# Altium PCB PCB_SteamShower.PcbDoc
Units mil, origin at the board's own origin, x right, y up, seen from the top; angles counter-clockwise.
Board outline 6000 x 4000 mil, 2 copper layers (Top Layer, Bottom Layer); 47 components, 61 nets, 182 pads, 0 vias.
Unrouted connection lines stored in the file: 103.
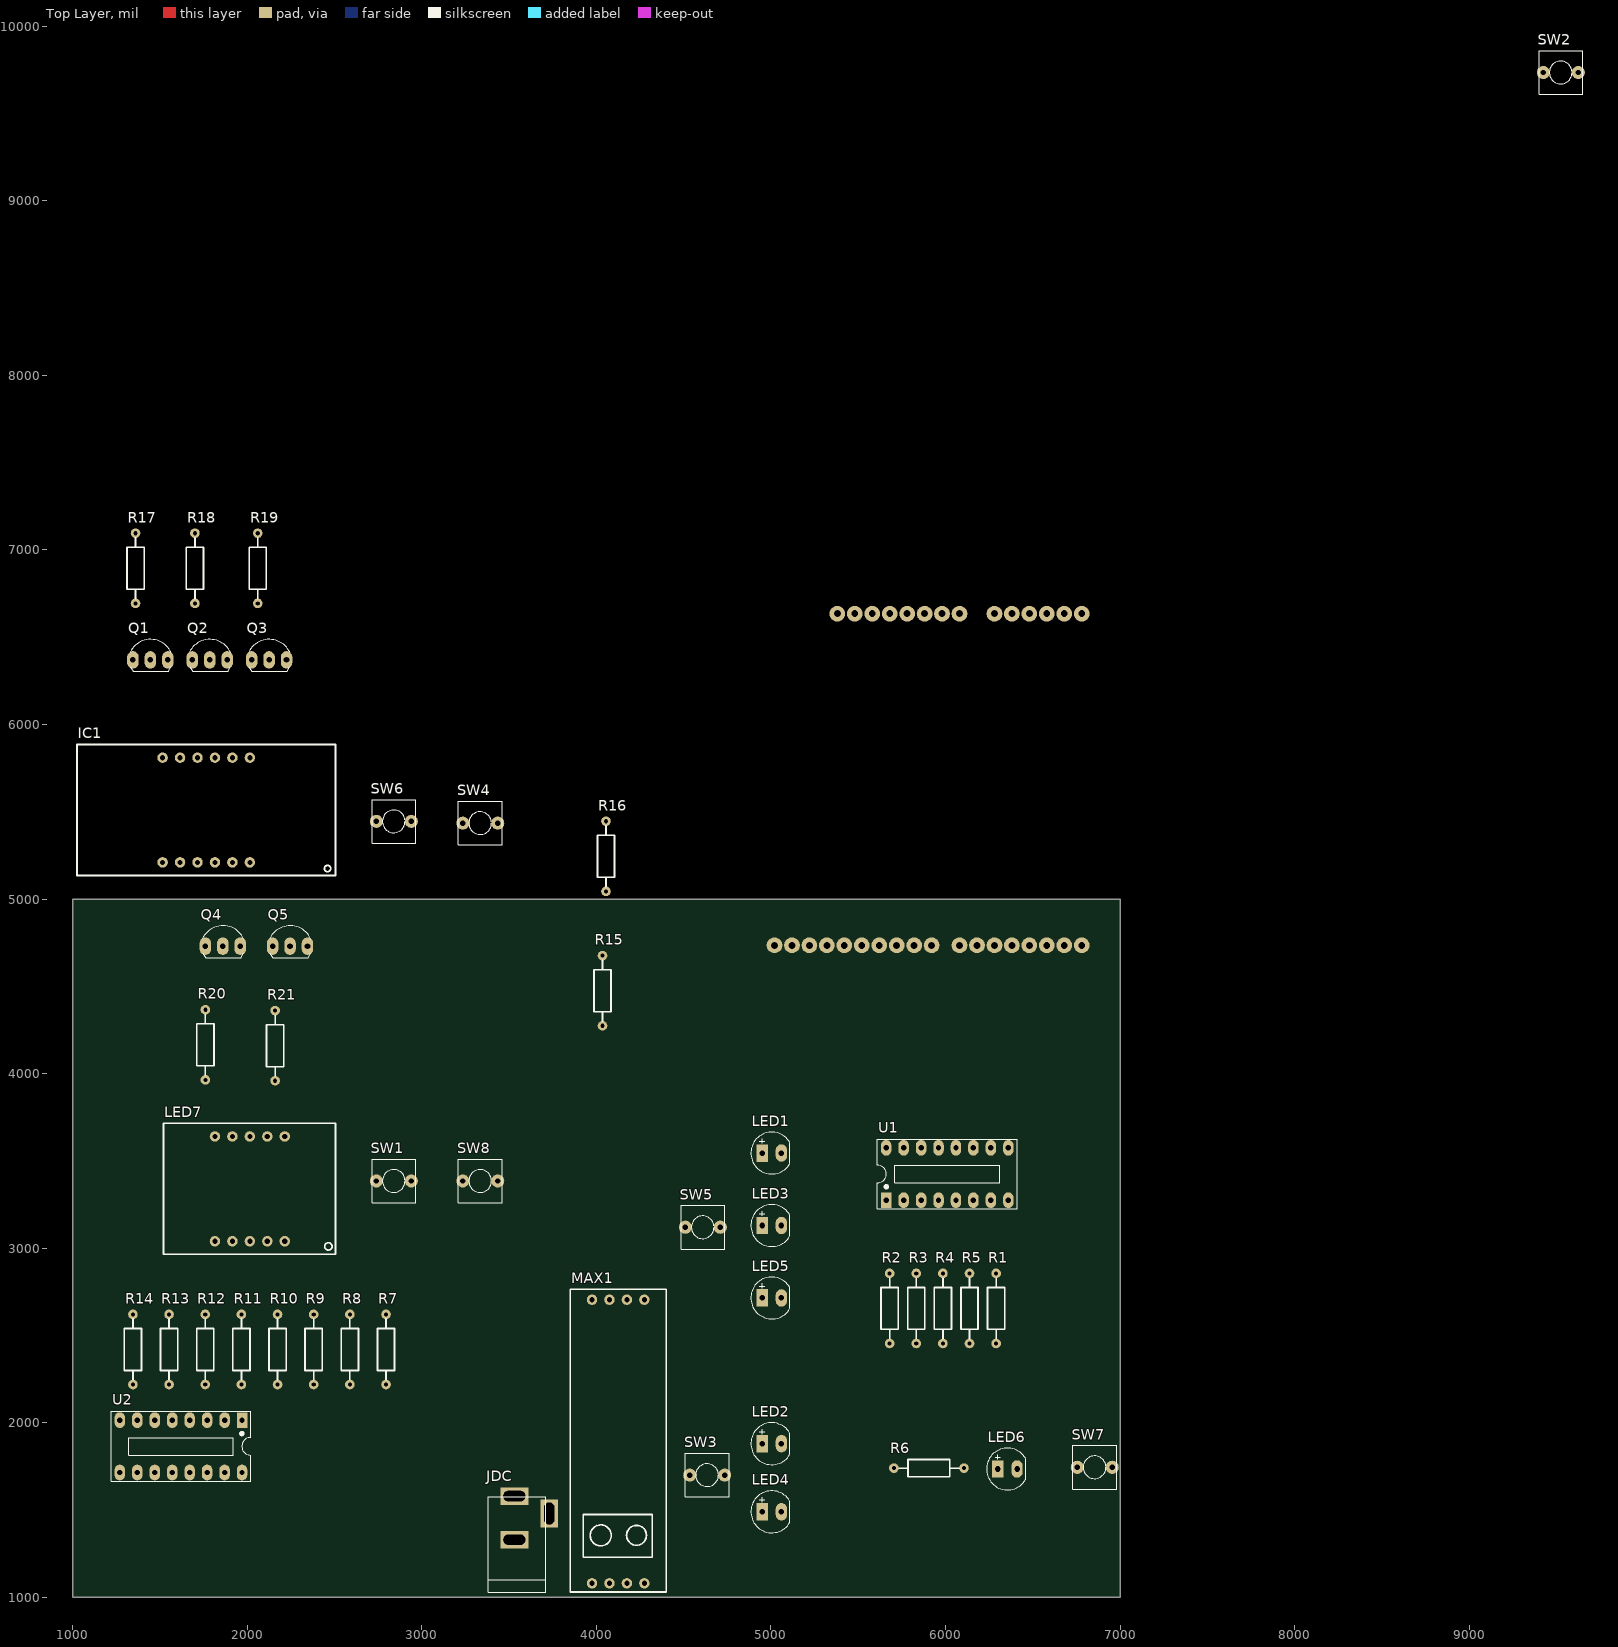
[diagram p0: Top Layer view]
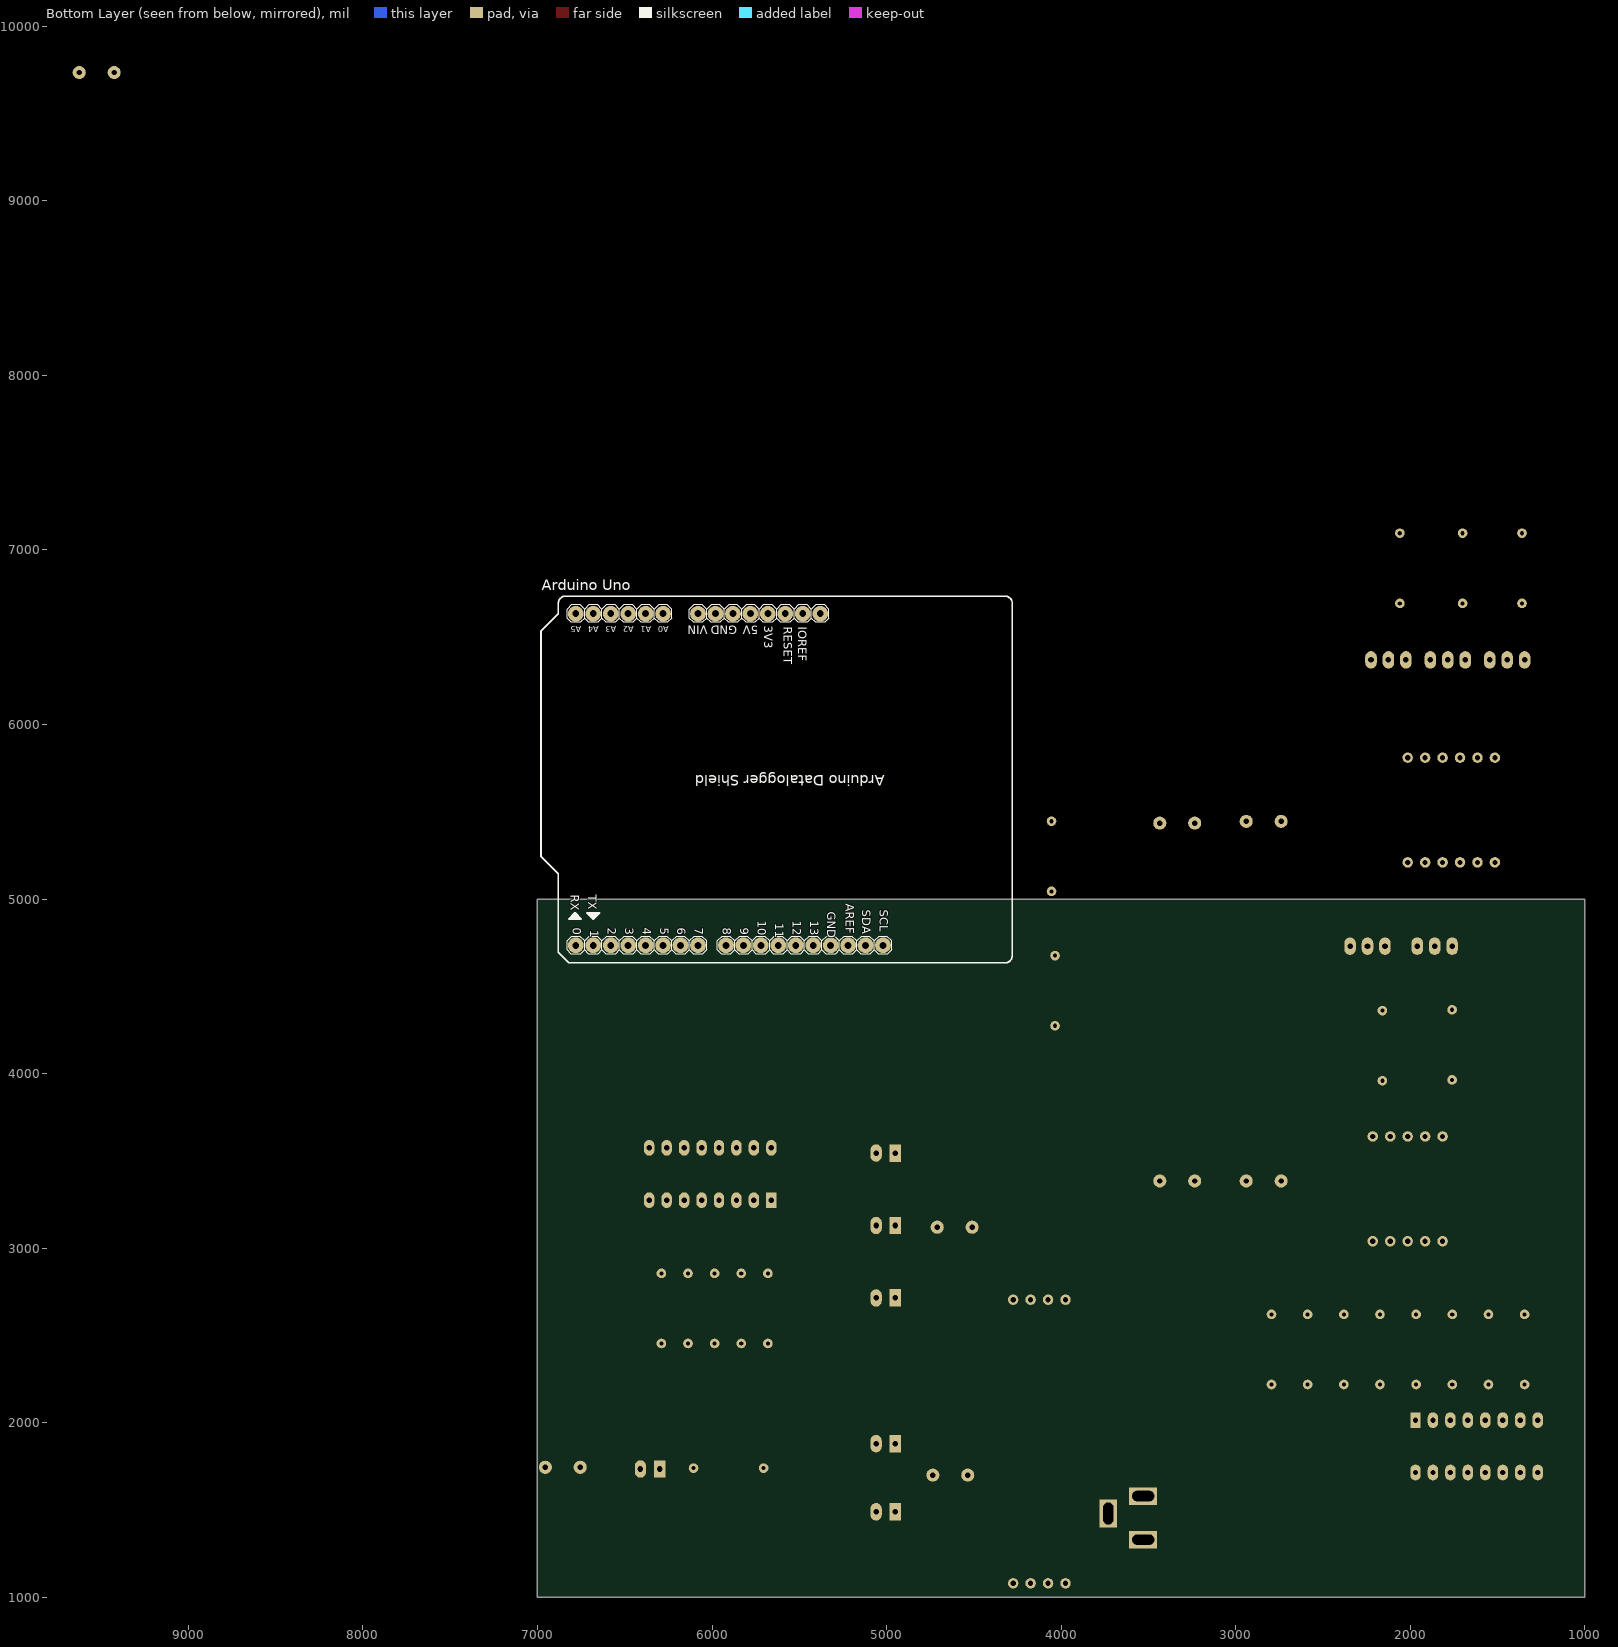
[diagram p1: Bottom Layer view, seen from below]

## Layer stack, top to bottom
Top Solder: solder mask 0.4, Solder Resist, Dk 3.5
Top Layer: signal copper 1.4
Dielectric 1: dielectric 12.6, FR-4, Dk 4.8
Bottom Layer: signal copper 1.4
Bottom Solder: solder mask 0.4, Solder Resist, Dk 3.5

## Board outline
1000,1000 7000,1000 7000,5000 1000,5000

## Design rules (kind name [scope] priority, off if disabled: settings)
Clearance [All] p1: gap=10
PolygonConnect [All] p1: connectstyle=Relief reliefconductorwidth=10 reliefentries=4 polygonreliefangle="90 Angle" airgapwidth=10
RoutingVias [All] p1: holewidth=28 width=50 viastyle="Through Hole" minholewidth=28 minwidth=50 maxholewidth=28 maxwidth=50
SolderMaskExpansion [All] p1: expansion=4
Width [All] p1: maxlimit=10 minlimit=10 preferedwidth=10
30 further rules are at their usual default settings.

## Components (designator, comment, footprint, x,y, rotation, side; value= is the part's Value field where it differs from the comment)
"Arduino Uno" "ARDUINO UNO" "ARDUINO UNO" 5700,5690 r0 bottom
IC1 "Component_1" 7SEG_MPX3 1515,5210 r0 top
JDC "Jack DC5.5x2.1" DC-IN 3630,1455 r90 top
LED1 "LED 5mm Do" "LED 5mm DO" 5005,3545 r0 top
LED2 "LED 5mm Do" "LED 5mm DO" 5005,1880 r0 top
LED3 "LED 5mm Do" "LED 5mm DO" 5005,3130 r0 top
LED4 "LED 5mm Do" "LED 5mm DO" 5005,1490 r0 top
LED5 "LED 5mm Do" "LED 5mm DO" 5005,2715 r0 top
LED6 "LED 5mm Do" "LED 5mm DO" 6355,1735 r0 top
LED7 "Component_1" 5621AS_Lib 1815,3040 r0 top
MAX1 "Component_1" MAX485_Module 4275,2705 r180 top
Q1 "C1815" QTO-92 1445,6370 r0 top
Q2 "C1815" QTO-92 1785,6370 r0 top
Q3 "C1815" QTO-92 2125,6370 r0 top
Q4 "C1815" QTO-92 1860,4730 r0 top
Q5 "C1815" QTO-92 2245,4730 r0 top
R1 "220R" "tro vach 1/4w" 6290,2655 r270 top
R2 "220R" "tro vach 1/4w" 5680,2655 r270 top
R3 "220R" "tro vach 1/4w" 5832.5,2655 r270 top
R4 "220R" "tro vach 1/4w" 5985,2655 r270 top
R5 "220R" "tro vach 1/4w" 6137.5,2655 r270 top
R6 "220R" "tro vach 1/4w" 5905,1740 r0 top
R7 "220R" "tro vach 1/4w" 2795,2420 r90 top
R8 "220R" "tro vach 1/4w" 2587.86,2420 r90 top
R9 "220R" "tro vach 1/4w" 2380.71,2420 r90 top
R10 "220R" "tro vach 1/4w" 2173.57,2420 r90 top
R11 "220R" "tro vach 1/4w" 1966.43,2420 r90 top
R12 "220R" "tro vach 1/4w" 1759.29,2420 r90 top
R13 "220R" "tro vach 1/4w" 1552.14,2420 r90 top
R14 "220R" "tro vach 1/4w" 1345,2420 r90 top
R15 "10k" "tro vach 1/4w" 4035,4475 r90 top
R16 "10k" "tro vach 1/4w" 4055,5245 r270 top
R17 "1k" "tro vach 1/4w" 1360,6895 r270 top
R18 "1k" "tro vach 1/4w" 1700,6895 r270 top
R19 "1k" "tro vach 1/4w" 2060,6895 r270 top
R20 "1k" "tro vach 1/4w" 1760,4165 r90 top
R21 "1k" "tro vach 1/4w" 2160,4160 r90 top
SW1 "Nut Nhan 2 Chan ( Dip )" SW2 2740,3385 r0 top
SW2 "Nut Nhan 2 Chan ( Dip )" SW2 9425,9735 r0 top
SW3 "Nut Nhan 2 Chan ( Dip )" SW2 4535,1700 r0 top
SW4 "Nut Nhan 2 Chan ( Dip )" SW2 3235,5435 r0 top
SW5 "Nut Nhan 2 Chan ( Dip )" SW2 4510,3120 r0 top
SW6 "Nut Nhan 2 Chan ( Dip )" SW2 2740,5445 r0 top
SW7 "Nut Nhan 2 Chan ( Dip )" SW2 6755,1745 r0 top
SW8 "Nut Nhan 2 Chan ( Dip )" SW2 3235,3385 r0 top
U1 "74HC595" DIP16/W0.3 5660,3275 r0 top
U2 "74HC595" DIP16/W0.3 1970,2015 r180 top

## Footprints (in the part's own frame and the unit in brackets; to place one, negate y for a bottom-side part, rotate by r counter-clockwise, add the part's x,y. Pads: shape width x height; smd on the part's side, far side on the other; paste and mask are expansions set on the pad)
7SEG_MPX3 [mil] "5631AS Led 7 segment 3 digits"
  round 60 hole 30: 1(0,0) 2(100,0) 3(200,0) 4(300,0) 5(400,0) 6(500,0) 7(500,600) 8(400,600) 9(300,600) 10(200,600) 11(100,600) 12(0,600)
  silkscreen extent -490,-75 990,675
5621AS_Lib [mil] "LED 7-segment 2 digits"
  round 60 hole 30: 1(0,0) 2(100,0) 3(200,0) 4(300,0) 5(400,0) 6(400,600) 7(300,600) 8(200,600) 9(100,600) 10(0,600)
  silkscreen extent -295,-75 690,675
"ARDUINO UNO" [mm]
  round 2.3 hole 1: 0(27.44,24.26) 1(24.9,24.26) 2(22.36,24.26) 3(19.82,24.26) 3.3V(-0.5,-24) 4(17.28,24.26) 5(14.74,24.26) 5V(2.04,-24) 6(12.2,24.26) 7(9.66,24.26) 8(5.596,24.26) 9(3.056,24.26) 10(0.516,24.26) 11(-2.024,24.26) 12(-4.564,24.26) 13(-7.104,24.26) A0(14.74,-24) A1(17.28,-24) A2(19.82,-24) A3(22.36,-24) A4(24.9,-24) A5(27.44,-24) AREF(-12.184,24.26) GND1(7.12,-24) GND2(4.58,-24) GND3(-9.644,24.26) IOREF(-5.58,-24) NC(-8.12,-24) RST(-3.04,-24) SCL(-17.264,24.26) SDA(-14.724,24.26) Vin(9.66,-24)
  silkscreen extent -36.06,-26.54 32.52,26.8
DC-IN [mil] "Jac DC input"
  rect 100x160 hole 59.06 slot 125.98 at 90 deg: 1(125,100) 2(-125,100)
  rect 160x100 hole 59.06 slot 125.98 at 0 deg: 3(25,-100)
  silkscreen extent -425,-80 120,250, body extent -410,-105 134,269, height 434
DIP16/W0.3 [mil] "16 PIN, W 300mil, Pin to pin 100mil"
  rect 60x90 hole 31: 1(0,0)
  oval 60x90 hole 31: 2(100,0) 3(200,0) 4(300,0) 5(400,0) 6(500,0) 7(600,0) 8(700,0) 9(700,300) 10(600,300) 11(500,300) 12(400,300) 13(300,300) 14(200,300) 15(100,300) 16(0,300)
  silkscreen extent -50,-50 750,350, body extent -52,-57 752,356, height 299
"LED 5mm DO" [mil] "LED 2 PIN, 5 ly , Only colour, pin to pin 110mil"
  rect 65x100 hole 32: 1(-55,0)
  oval 65x100 hole 32: 2(55,0)
  silkscreen extent -120,-120 104,120, body extent -116,-117 98,120, height 339
MAX485_Module [mil]
  round 60 hole 30: 1(0,0) 2(100,0) 3(200,0) 4(300,0) 5(300,1625) 6(200,1625) 7(100,1625) 8(0,1625)
  silkscreen extent -125,-60 425,1675
QTO-92 [mil] "TO-92"
  oval 66x100 hole 32: 1(-100,0) 2(0,0) 3(100,0)
  silkscreen extent -117,-65 120,118, body extent -109,-66 109,95, height 245
SW2 [mil] "SW button 2pin, 250x 250 mil"
  round 75 hole 31: 1(0,0) 2(200,0)
  silkscreen extent -25,-125 225,125
"tro vach 1/4w" [mm]
  round 1.4 hole 0.6: 1(-5.1,0) 2(5.1,0)
  silkscreen extent -4.39,-1.25 4.42,1.25, body extent -5.38,-1.2 5.38,1.2, height 2.41

## Part data
IC1: "5631AS LED 7 Segment 3 digits"
JDC: library part Jac_DC, "C?m"
LED1 LED2 LED3 LED4 LED5 LED6 SW1 SW2 SW3 SW4 SW5 SW6 SW7 SW8: "C?m"
Q1 Q2 Q3 Q4 Q5 U1 U2: "Dán"
R1 R2 R3 R4 R5 R6 R7 R8 R9 R10 R11 R12 R13 R14: library part "Tro Vach 1/4W 5% 220R", "C?m"
R15 R16: library part "Tro Vach 1/4W 5% 10k", "Cam"
R17 R18 R19 R20 R21: library part "Tro Vach 1/4W 5% 1k", "C?m"

## Nets (pads, with @x,y where several pads share a name; then routed paths per layer and width w, separated by ;. In a path a pad name is that pad's centre, name@x,y a point inside that pad or via, vN(x,y) a via of type N, cw(c..) or ccw(c..) an arc to the next point about the centre after c; other vN are vias at no path point)
5V: "Arduino Uno.Vin" JDC.1 MAX1.8 U1.10 U1.16 U2.10 U2.16
A: IC1.11 LED7.10 R7.2
B: IC1.7 LED7.9 R8.2
C: IC1.4 LED7.1 R9.2
C1: "Arduino Uno.A4" R15.1 SW1.2 SW3.2 SW5.2 SW7.2
C2: "Arduino Uno.A5" R16.1 SW2.2 SW4.2 SW6.2 SW8.2
D: IC1.2 LED7.4 R10.2
DE_RE: "Arduino Uno.10" MAX1.2 MAX1.3
DI1: IC1.12 Q1.2
DI2: IC1.9 Q2.2
DI3: IC1.8 Q3.2
DIGIT1: LED7.8 Q4.2
DIGIT2: LED7.7 Q5.2
DIO: "Arduino Uno.2" U2.14
DIO2: "Arduino Uno.13" U1.14
DP: IC1.3 LED7.2
E: IC1.1 LED7.3 R11.2
F: IC1.10 LED7.6 R12.2
G: IC1.5 LED7.5 R13.2
GND: "Arduino Uno.GND2" JDC.2 LED1.2 LED2.2 LED3.2 LED4.2 LED5.2 LED6.2 MAX1.5 Q1.3 Q2.3 Q3.3 Q4.3 Q5.3 R15.2 R16.2 U1.8 U1.13 U2.8 U2.13
H: R14.2
NetQ1_1: Q1.1 R17.2
NetQ2_1: Q2.1 R18.2
NetQ3_1: Q3.1 R19.2
NetQ4_1: Q4.1 R20.2
NetQ5_1: Q5.1 R21.2
NetR1_1: R1.1 U1.15
NetR2_1: R2.1 U1.1
NetR3_1: R3.1 U1.2
NetR4_1: R4.1 U1.3
NetR5_1: R5.1 U1.4
NetR6_1: R6.1 U1.5
NetR7_1: R7.1 U2.15
NetR8_1: R8.1 U2.1
NetR9_1: R9.1 U2.2
NetR10_1: R10.1 U2.3
NetR11_1: R11.1 U2.4
NetR12_1: R12.1 U2.5
NetR13_1: R13.1 U2.6
NetR14_1: R14.1 U2.7
OFF: LED5.1 R3.2
ON_OFF: LED6.1 R6.2
R1: "Arduino Uno.A0" SW7.1 SW8.1
R2: "Arduino Uno.A1" SW5.1 SW6.1
R3: "Arduino Uno.A2" SW3.1 SW4.1
R4: "Arduino Uno.A3" SW1.1 SW2.1
RCLK: "Arduino Uno.3" U2.12
RCLK2: "Arduino Uno.11" U1.12
RX: "Arduino Uno.0" MAX1.1
SCLK: "Arduino Uno.4" U2.11
SCLK2: "Arduino Uno.12" U1.11
START: LED2.1 R4.2
STOP: LED4.1 R5.2
TE1: "Arduino Uno.7" R17.1
TE2: "Arduino Uno.8" R18.1
TE3: "Arduino Uno.9" R19.1
TEMP: LED1.1 R1.2
TI1: "Arduino Uno.5" R20.1
TI2: "Arduino Uno.6" R21.1
TIME: LED3.1 R2.2
TX: "Arduino Uno.1" MAX1.4
pads on no net: "Arduino Uno.3.3V" "Arduino Uno.5V" "Arduino Uno.AREF" "Arduino Uno.GND1" "Arduino Uno.GND3" "Arduino Uno.IOREF" "Arduino Uno.NC" "Arduino Uno.RST" "Arduino Uno.SCL" "Arduino Uno.SDA" IC1.6 JDC.3 MAX1.6 MAX1.7 U1.6 U1.7 U1.9 U2.9

## Text inside footprints (layer, text, board x,y; h text height)
"Arduino Uno": Bottom Overlay "Arduino Datalogger Shield" at 5011.02,5709.69 h60 r180; Bottom Overlay "SDA" at 5138.13,4938.54 h47.6 r90; Bottom Overlay "SCL" at 5038.58,4938.03 h47.6 r90; Bottom Overlay "0" at 6797.9,4836.6 h47.6 r90; Bottom Overlay "1" at 6697.9,4820.74 h47.6 r90; Bottom Overlay "2" at 6597.9,4836.6 h47.6 r90; Bottom Overlay "3" at 6497.9,4836.6 h47.6 r90; Bottom Overlay "4" at 6397.9,4836.6 h47.6 r90; Bottom Overlay "5" at 6297.9,4836.6 h47.6 r90; Bottom Overlay "6" at 6197.9,4836.6 h47.6 r90; Bottom Overlay "7" at 6097.9,4836.6 h47.6 r90; Bottom Overlay "8" at 5937.9,4836.6 h47.6 r90; Bottom Overlay "9" at 5837.9,4836.6 h47.6 r90; Bottom Overlay "10" at 5737.9,4876.26 h47.6 r90; Bottom Overlay "11" at 5637.9,4860.4 h47.6 r90; Bottom Overlay "12" at 5537.9,4876.26 h47.6 r90; Bottom Overlay "13" at 5437.9,4876.26 h47.6 r90; Bottom Overlay "RX" at 6810.31,5024.88 h47.6 r90; Bottom Overlay "TX" at 6710.31,5023.88 h47.6 r90; Bottom Overlay "IOREF" at 5505.31,6559.88 h47.6 r90; Bottom Overlay "GND" at 5856.31,6564.88 h47.6 r180; Bottom Overlay "VIN" at 6025.31,6564.88 h47.6 r180; Bottom Overlay "A5" at 6749.31,6563.88 h34 r180; Bottom Overlay "A4" at 6649.31,6563.88 h34 r180; Bottom Overlay "A3" at 6549.31,6563.88 h34 r180; Bottom Overlay "A2" at 6449.31,6563.88 h34 r180; Bottom Overlay "A1" at 6349.31,6563.88 h34 r180; Bottom Overlay "3V3" at 5700.31,6564.88 h47.6 r90; Bottom Overlay "RESET" at 5590.31,6559.88 h47.6 r90; Bottom Overlay "GND" at 5338.9,4926.77 h47.6 r90; Bottom Overlay "AREF" at 5234.9,4973.36 h47.6 r90; Bottom Overlay "A0" at 6249.31,6563.88 h34 r180; Bottom Overlay "5V" at 5735.31,6564.88 h47.6 r180